# Altium PCB SensorBoard.PcbDoc
Units mm, origin at the board's own origin, x right, y up, seen from the top; angles counter-clockwise.
Board outline 50.6 x 61.95 mm, 2 copper layers (Top Layer, Bottom Layer); 26 components, 34 nets, 150 pads, 24 vias.
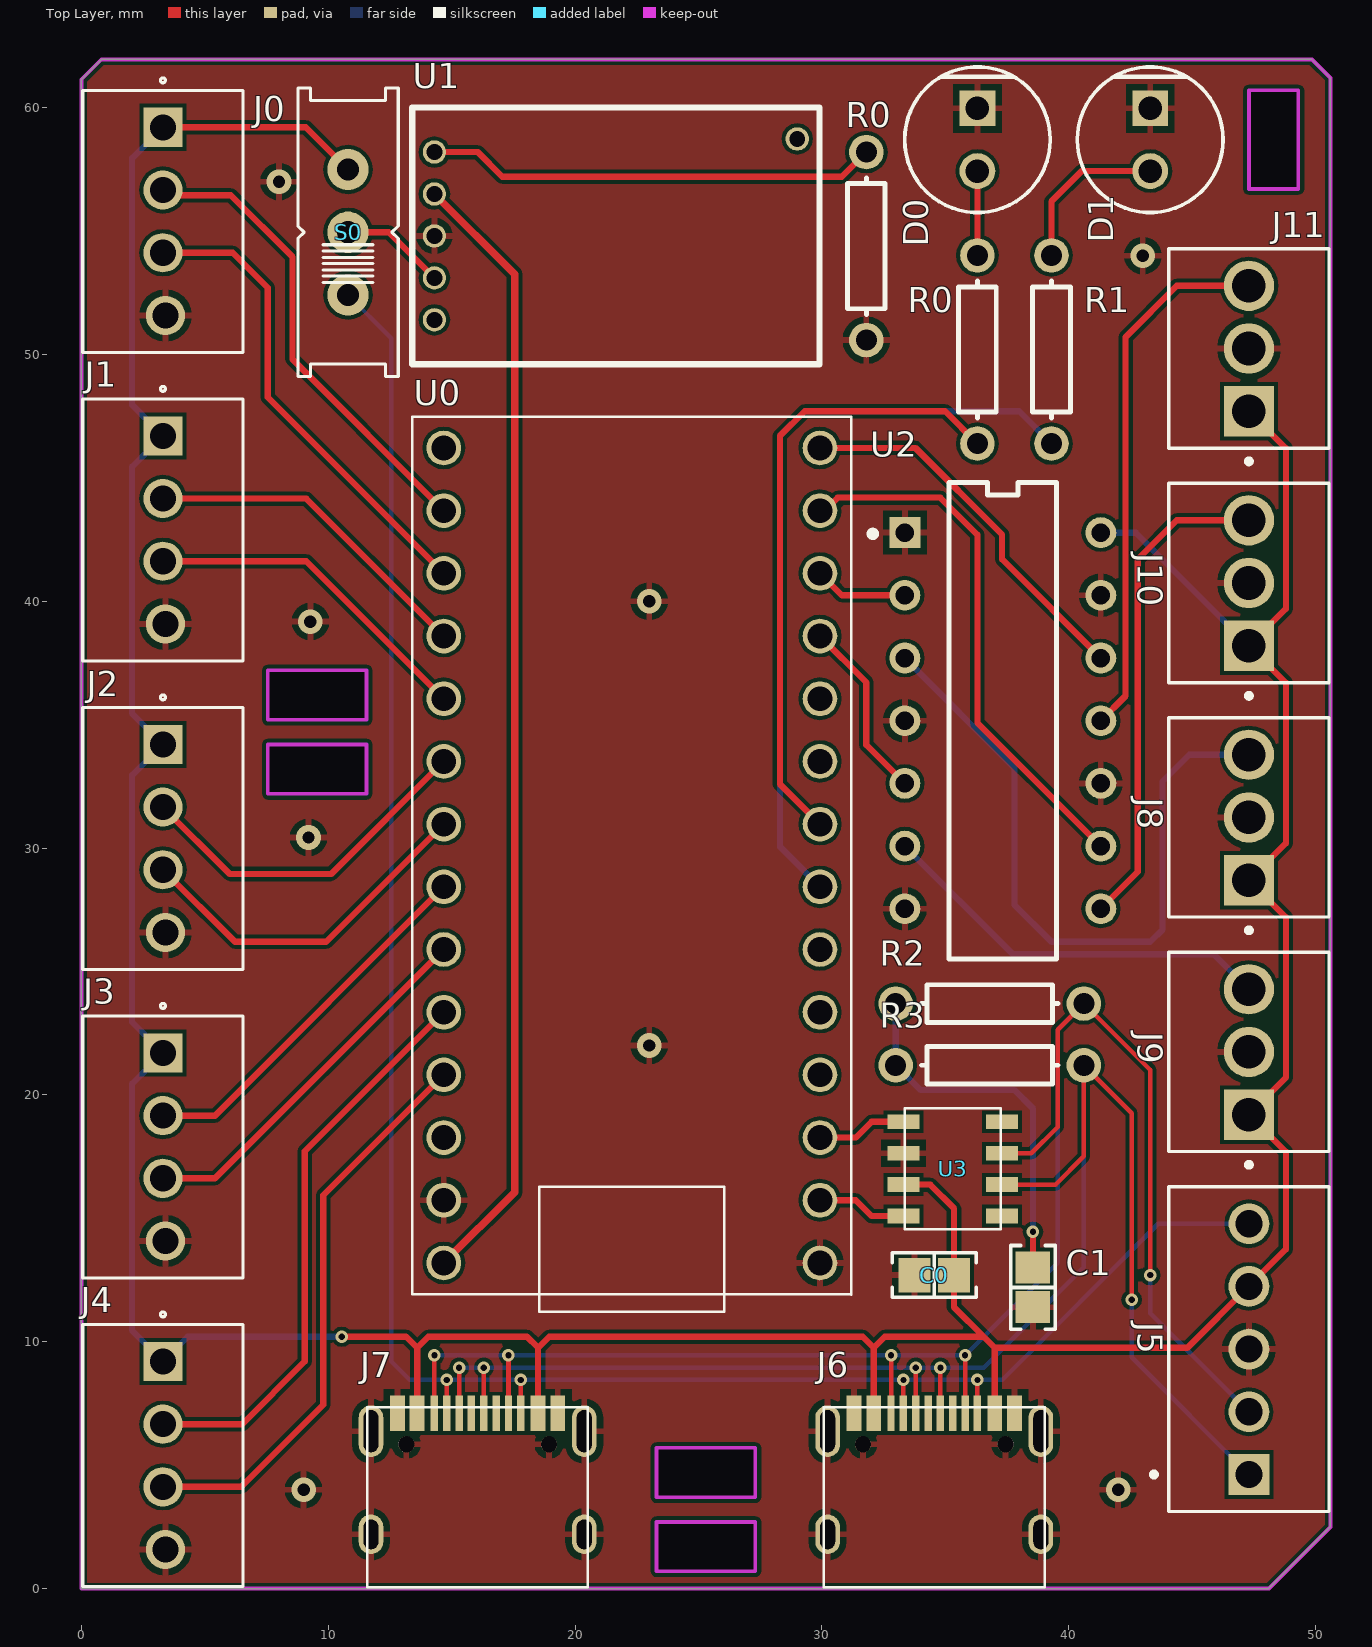
[diagram p0: Top Layer view]
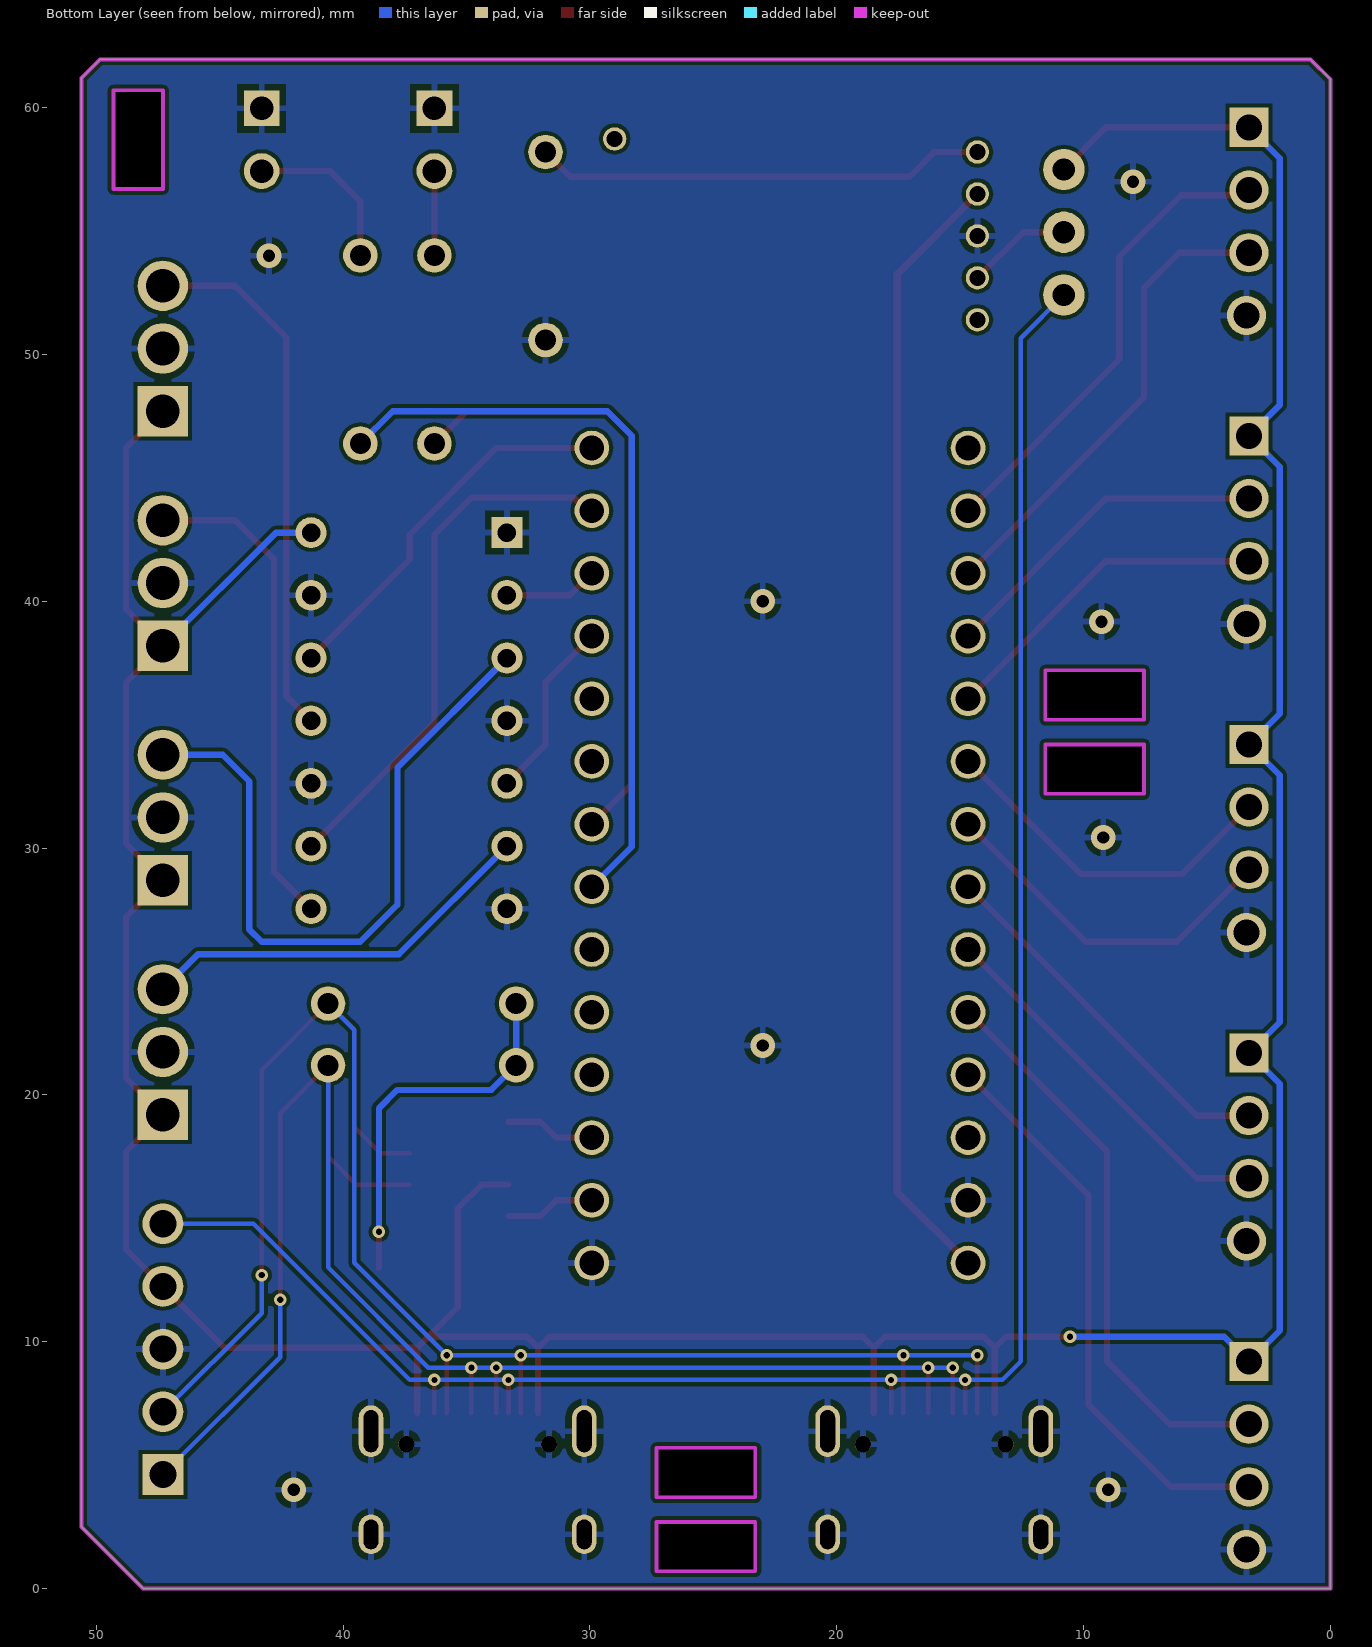
[diagram p1: Bottom Layer view, seen from below]

## Layer stack, top to bottom
Top Solder: solder mask 0.0102, Solder Resist, Dk 3.5
Top Layer: signal copper 0.0356
Dielectric 1: dielectric 0.32, FR-4, Dk 4.8
Bottom Layer: signal copper 0.0356
Bottom Solder: solder mask 0.0102, Solder Resist, Dk 3.5

## Board outline
0.8,61.95 0,61.15 0,0 48.1,0 50.6,2.5 50.6,61.2 49.85,61.95 49.8,61.95
cut-out: 47.3,56.7 47.3,60.7 49.3,60.7 49.3,56.7
cut-out: 23.3,0.7 23.3,2.7 27.3,2.7 27.3,0.7
cut-out: 23.3,3.7 23.3,5.7 27.3,5.7 27.3,3.7
cut-out: 7.55,32.2 7.55,34.2 11.55,34.2 11.55,32.2
cut-out: 7.55,35.2 7.55,37.2 11.55,37.2 11.55,35.2

## Design rules (kind name [scope] priority, off if disabled: settings)
Clearance Clearance_M0BGA_Fanout [WithinRoom('M0BGA_Fanout')] p1: gap=0.065 ignorepadtopadclearanceinfootprint=FALSE except(0: Arc-Hole Track-Hole SMDPad-Hole THPad-Hole Via-Hole Fill-Hole Poly-Hole Region-Hole Text-Hole)
Clearance [All] p2: gap=0.152 ignorepadtopadclearanceinfootprint=FALSE except(0: Arc-Hole Track-Hole SMDPad-Hole THPad-Hole Via-Hole Fill-Hole Poly-Hole Region-Hole Text-Hole)
ComponentClearance [All] p1: gap=0.203 collisioncheckmode=3 verticalgap=0.203 showdistances=FALSE
FanoutControl Fanout_BGA [IsBGA] p1: bgadir=Out bgaviamode=Centered fanoutstyle=BGA fanoutdirection=Alternating viagrid=0.025 // Fanout_BGA (Default Rule)
HoleSize [All] p1: absolutevalues=TRUE maxlimit=2.54 minlimit=0.254 maxpercent=80.000 minpercent=20.000
HoleToHoleClearance [All] p1: gap=0.152 allowstackedmicrovias=TRUE
MinimumAnnularRing [All] p1: minimumring=0.005
MinimumSolderMaskSliver MinimumSolderMaskSliver_M0BGA_Fanout [All] p1: minsoldermaskwidth=0.1
MinimumSolderMaskSliver [All] p2: minsoldermaskwidth=0.127
PlaneClearance [All] p1: clearance=0.254
PolygonConnect [All] p1: connectstyle=Relief reliefconductorwidth=0.254 reliefentries=4 polygonreliefangle="90 Angle" airgapwidth=0.254
RoutingVias RoutingVias_M0BGA_Fanout [WithinRoom('M0BGA_Fanout')] p1: holewidth=0.1 width=0.2 viastyle="Through Hole" minholewidth=0.1 minwidth=0.2 maxholewidth=0.1 maxwidth=0.2
RoutingVias [All] p2: holewidth=0.254 width=0.358 viastyle="Through Hole" minholewidth=0.076 minwidth=0.178 maxholewidth=0.254 maxwidth=0.4
SilkToSilkClearance [All] p1: silktosilkclearance=0.127
SilkToSolderMaskClearance [IsPad] p1: minsilkscreentomaskgap=0.127 clearancetoexposedcopper=TRUE
SolderMaskExpansion SolderMaskExpansion_M0BGA_Fanout [WithinRoom('M0BGA_Fanout')] p1: expansion=0.01 istentingtop=FALSE
SolderMaskExpansion [All] p2: expansion=0.102 istentingtop=FALSE
UnRoutedNet [All] p1: checkbadconnections=TRUE
Width Width_M0BGA_Fanout [WithinRoom('M0BGA_Fanout')] p1: maxlimit=0.065 minlimit=0.065 preferedwidth=0.065 minimp=50.000000 maximp=50.000000 favimp=50.000000
Width [All] p2: maxlimit=12.7 minlimit=0.065 preferedwidth=0.254 minimp=50.000000 maximp=50.000000 favimp=50.000000
21 further rules are at their usual default settings.

## Classes and differential pairs
component class DC-DCConverter: R0 S0 U1
component class CanTransceiver: C0 C1 R2 R3 U3
component class SensorBoard: D0 D1 J0 J1 J2 J3 J4 J5 J6 J7 J8 J9 J10 J11 R0 R1 U0 U2

## Components (designator, comment, footprint, x,y, rotation, side; value= is the part's Value field where it differs from the comment)
C0 "0.47µF" "CAP 0805_2012" 34.55,12.7 r0 top
C1 "0.47µF" "CAP 0805_2012" 38.55,12.2 r90 top
D0 "Diode_Lumex_SSL-LX5093GD_eec" Lumex_SSL-LX5093GD_0 36.3,58.7 r270 top
D1 "Diode_Lumex_SSL-LX5093GD_eec" Lumex_SSL-LX5093GD_0 43.3,58.7 r270 top
J0 "282834-4" *HDRV4W85P254_4X1_1062X650X1000 3.3,59.2 r270 top
J1 "282834-4" *HDRV4W85P254_4X1_1062X650X1000 3.3,46.7 r270 top
J2 "282834-4" *HDRV4W85P254_4X1_1062X650X1000 3.3,34.2 r270 top
J3 "282834-4" *HDRV4W85P254_4X1_1062X650X1000 3.3,21.7 r270 top
J4 "282834-4" *HDRV4W85P254_4X1_1062X650X1000 3.3,9.2 r270 top
J5 "282834-5" *TE_282834-5 47.3,9.7 r90 top
J6 "USB-C Socket" TYPE-C-31-M-12 34.55,3.7 r0 top
J7 "USB-C Socket" TYPE-C-31-M-12 16.05,3.7 r0 top
J8 "282834-3" *TE_282834-3 47.3,28.7 r90 top
J9 "282834-3" *TE_282834-3 47.3,19.2 r90 top
J10 "282834-3" *TE_282834-3 47.3,38.2 r90 top
J11 "282834-3" *TE_282834-3 47.3,47.7 r90 top
R0 "" AXIAL-0.3 31.8,54.39 r90 top value=1K
R0 "Res1" AXIAL-0.3 36.3,50.2 r90 top value=1K
R1 "Res1" AXIAL-0.3 39.3,50.2 r90 top value=1K
R2 "Res1" AXIAL-0.3 36.8,23.7 r0 top value=1K
R3 "Res1" AXIAL-0.3 36.8,21.2 r180 top value=1K
S0 "EG1218" *EG1218_EG1218(Primary) 10.8,54.95 r90 top
U0 "Teensy 3.2/4.0 Mounting" "Teensy 3.2-4.0" 22.3,29.7 r90 top
U1 "" NE12S0A0V10PNFA 29.9,60 r270 top
U2 "IC_Texas_Instruments_SN74AHCT125N_eec" Texas_Instruments_SN74AHCT125N_0 37.33,35.16 r0 top
U3 "High speed CAN Transiver NC Variant" TJA1051T 35.3,17 r270 top

## Footprints (in the part's own frame and the unit in brackets; to place one, negate y for a bottom-side part, rotate by r counter-clockwise, add the part's x,y. Pads: shape width x height; smd on the part's side, far side on the other; paste and mask are expansions set on the pad)
*EG1218_EG1218(Primary) [mil]
  round 66 hole 35.43: O(-100,0) P(0,0) S(100,0)
  silkscreen extent -230,-80 230,80
*HDRV4W85P254_4X1_1062X650X1000 [mm]
  rect 1.59x1.59 hole 1.06: 1(0,0)
  round 1.59 hole 1.06: 2(2.54,0) 3(5.08,0) 4(7.62,0.1)
  silkscreen extent -2,-3.25 9.12,3.25
*TE_282834-3 [mm]
  rect 2.04x2.04 hole 1.36: 1(0,0)
  round 2.04 hole 1.36: 2(2.54,0) 3(5.08,0)
  silkscreen extent -2.13,-3.25 6.58,3.25
*TE_282834-5 [mm]
  rect 1.65x1.65 hole 1.1: 1(-5.08,0)
  round 1.65 hole 1.1: 2(-2.54,0) 3(0,0) 4(2.54,0) 5(5.08,0)
  silkscreen extent -6.58,-3.25 6.58,3.95
AXIAL-0.3 [mm] "Axial Device, Thru-Hole; 2 Leads; 0.3 in Pin Spacing"
  round 1.4 hole 0.85: 1(-3.81,0) 2(3.81,0)
  silkscreen extent -2.77,-0.76 2.77,0.76
"CAP 0805_2012" [mm] "Chip Capacitor, 2-Leads, Body 2.00x1.20mm, IPC Medium Density"
  rect 1.3x1.4 smd: 1(-0.8,0) 2(0.8,0)
  silkscreen extent -1.7,-0.9 1.7,0.9, body extent -1,-0.64 1,0.64, height 1.26
Lumex_SSL-LX5093GD_0 [mm]
  rect 1.45x1.45 hole 0.95 paste-1000 mask+0: 1(-1.27,0)
  round 1.45 hole 0.95 paste-1000 mask+0: 2(1.27,0)
  silkscreen extent -2.95,-2.95 2.95,2.95
NE12S0A0V10PNFA [mm]
  round 0.946 hole 0.64: 1(8.6,-15.6) 2(6.9,-15.6) 3(5.2,-15.6) 4(3.5,-15.6) 5(1.8,-15.6) 6(1.27,-0.9)
  silkscreen extent 0,-16.5 10.4,0
"Teensy 3.2-4.0" [mm]
  round 1.406 hole 1: 0(-13.97,-7.62) 1(-11.43,-7.62) 2(-8.89,-7.62) 3(-6.35,-7.62) 3.3V(-11.43,7.62) 4(-3.81,-7.62) 5(-1.27,-7.62) 6(1.27,-7.62) 7(3.81,-7.62) 8(6.35,-7.62) 9(8.89,-7.62) 10(11.43,-7.62) 11(13.97,-7.62) 12(16.51,-7.62) 13(16.51,7.62) 14(13.97,7.62) 15(11.43,7.62) 16(8.89,7.62) 17(6.35,7.62) 18(3.81,7.62) 19(1.27,7.62) 20(-1.27,7.62) 21(-3.81,7.62) 22(-6.35,7.62) 23(-8.89,7.62) GND(-16.51,-7.62) GND2(-13.97,7.62) Vin(-16.51,7.62)
  silkscreen extent -18.48,-8.89 17.78,8.89, body extent -19.2,-8.9 17.8,8.97, height 4.39
Texas_Instruments_SN74AHCT125N_0 [mm]
  rect 1.25x1.25 hole 0.75 paste-1000 mask+0: 1(-3.97,7.62)
  round 1.25 hole 0.75 paste-1000 mask+0: 2(-3.97,5.08) 3(-3.97,2.54) 4(-3.97,0) 5(-3.97,-2.54) 6(-3.97,-5.08) 7(-3.97,-7.62) 8(3.97,-7.62) 9(3.97,-5.08) 10(3.97,-2.54) 11(3.97,0) 12(3.97,2.54) 13(3.97,5.08) 14(3.97,7.62)
  silkscreen extent -5.39,-9.65 2.17,9.65
TJA1051T [mm]
  rect 0.6x1.3 smd: 0(-1.91,-2) 1(-0.635,-2) 2(0.635,-2) 3(1.91,-2) 4(1.91,2) 5(0.635,2) 6(-0.635,2) 7(-1.91,2)
  silkscreen extent -2.45,-1.95 2.45,1.95
TYPE-C-31-M-12 [mm]
  rect 0.6x1.45 smd paste+0 mask+0.075: 0(-3.25,3.4)
  rect 0.6x1.45 smd mask+0.075: 1(-2.45,3.4) 10(2.45,3.4) 11(3.25,3.4)
  rect 0.3x1.45 smd mask+0.075: 2(-1.75,3.4) 3(-1.25,3.4) 4(-0.75,3.4) 5(-0.25,3.4) 6(0.25,3.4) 7(0.75,3.4) 8(1.25,3.4) 9(1.75,3.4)
  oval 1x1.6 hole 1.2 slot 0.6 at 0 deg mask+0.075: 12(-4.32,-1.506) 12(4.32,-1.506)
  oval 1x2.1 hole 1.7 slot 0.6 at 0 deg mask+0.075: 12(-4.32,2.675) 12(4.32,2.675)
  round 0.65 hole 0.65 mask+0: 12(-2.89,2.145) 12(2.89,2.145)
  silkscreen extent -4.47,-3.65 4.47,3.65

## Part data
C0 C1: library part C0805X474K4RACAUTO, "CAP CER 0.47UF 16V X7R 0805 AUTO", Device Package="0805 (2012 Metric)", Manufacturer=KEMET, Operating Temperature="-55°C ~ 125°C", Ratings=AEC-Q200, Supplier Part Number 1=399-16453-1-ND, Temperature Coefficient=X7R, Tolerance=±10%, Voltage - Rated=16V, Applications="Automotive, Boardflex Sensitive", Capacitance=0.47µF, ComponentLink1Description=Datasheet, ComponentLink1URL=https://api.kemet.com/component-edge/download/datasheet/C0805X474K4RACAUTO.pdf, ComponentLink2Description="DigiKey Link", ComponentLink2URL=http://digikey.com/product-detail/en/kemet/C0805X474K4RACAUTO/399-16453-1-ND/7803645, Features="Soft Termination", LastUpdated="1/21/2020 12:03:05 AM", Lifecycle Status=Active, Minimum Order=1, Mounting Type="Surface Mount, MLCC", Package / Case="0805 (2012 Metric)", Packaging=TapeAndReel, Part Number=C0805X474K4RACAUTO, Part Status=Active, PartId=2963, Price=0.25, Series="SMD Auto X7R Flex", Size / Dimension="0.079\" L x 0.049\" W (2.00mm x 1.25mm)", Supplier 1=DigiKey, Thickness (Max)="0.039\" (1.00mm)"
D0 D1: "DIODE LED GRN DIFF 5MM ROUND T/H", Current=20mA, Digikey Part Number=67-1098-ND, Manufacturer=Lumex, Mouser Part Number=696-SSL-LX5093GD, Package=RADIAL, Part Number=SSL-LX5093GD, Temperature="-40°C to +85°C", Temperature Range High=+85°C, Temperature Range Low=-40°C, Voltage - Forward (Vf) (Typ)=2.2V, ComponentLink1Description=Upverter, ComponentLink1URL=https://upverter.com/upn/revision/3e2d87dde4bc0270/, ComponentLink2Description=Datasheet, ComponentLink2URL=https://upverter.com/datasheet/272633366bbf9b7ac85ecec6850b6be956700e69.pdf, Digikey Description="DIODE LED GRN DIFF 5MM ROUND T/H", helpURL=https://upverter.com/upn/revision/3e2d87dde4bc0270/, Lead Free=yes, Price=0.134141512812, RoHS=TRUE, Supplier 1=Digi-Key, Supplier 2=Mouser, Supplier Part Number 1=67-1098-ND, Supplier Part Number 2=696-SSL-LX5093GD, Viewing Angle=60°
J0 J1 J2 J3 J4: "4 Position Wire to Board Terminal Block Horizontal with Board 0.100 _2.54mm_ Through Hole", Package=None, Availability=Unavailable, Centerline_Pitch="2.54 mm[.1 in]", EU_RoHS_Compliance="Compliant with Exemptions", MF="TE Connectivity", MP=282834-4, Number_of_Positions=4, Price=None, SnapEDA_Link=https://www.snapeda.com/parts/282834-4/TE%20Connectivity%20AMP%20Connectors/view-part/448422/?ref=snap, TE_purchase_URL=https://www.te.com/usa-en/product-282834-4.html?te_bu=Cor&te_type=disp&te_campaign=seda_glo_cor-seda-global-disp-prtnr-fy19-seda-model-bom-cta_sma-317_1&elqCampaignId=32493
J5: "Buchanan; Conn; Term Blk; PCB; 5; 2.54mm; Front; 30-16 AWG; Green; 10 A; 150 V", Package=None, Availability=Unavailable, EU_RoHS_Compliance="Compliant with Exemptions", MF="TE Connectivity", MP=282834-5, Price=None, SnapEDA_Link=https://www.snapeda.com/parts/282834-5/TE%20Connectivity%20AMP%20Connectors/view-part/641357/?ref=snap, TE_purchase_URL=https://www.te.com/usa-en/product-282834-5.html?te_bu=Cor&te_type=disp&te_campaign=seda_glo_cor-seda-global-disp-prtnr-fy19-seda-model-bom-cta_sma-317_1&elqCampaignId=32493
J6 J7: library part TYPE-C-31-M-12
J8 J9 J10 J11: "3 Position Wire to Board Terminal Block Horizontal with Board 0.100 _2.54mm_", Package=None, Availability=Unavailable, EU_RoHS_Compliance="Compliant with Exemptions", MF="TE Connectivity", MP=282834-3, Price=None, SnapEDA_Link=https://www.snapeda.com/parts/282834-3/TE%20Connectivity%20AMP%20Connectors/view-part/398089/?ref=snap, TE_purchase_URL=https://www.te.com/usa-en/product-282834-3.html?te_bu=Cor&te_type=disp&te_campaign=seda_glo_cor-seda-global-disp-prtnr-fy19-seda-model-bom-cta_sma-317_1&elqCampaignId=32493
R0: library part Res1, "Resistor", LatestRevisionDate=17-Jul-2002, LatestRevisionNote="Re-released for DXP Platform.", PackageDescription="Axial Device, Thru-Hole; 2 Leads; 0.3 in Pin Spacing", PackageReference=AXIAL-0.3, Published=8-Jun-2000, Publisher="Altium Limited"
R0 R1 R2 R3: "Resistor", LatestRevisionDate=17-Jul-2002, LatestRevisionNote="Re-released for DXP Platform.", PackageDescription="Axial Device, Thru-Hole; 2 Leads; 0.3 in Pin Spacing", PackageReference=AXIAL-0.3, Published=8-Jun-2000, Publisher="Altium Limited"
S0: "Slide Switch SPDT Through Hole", Package="FakePackage u", Availability=Unavailable, MF=E-Switch, MP=EG1218, Price=None, SnapEDA_Link=https://www.snapeda.com/parts/EG1218/E-Switch/view-part/13895/?ref=snap
U0: library part "Teensy 3.2/4.0"
U1: library part Component_1
U2: "IC BUS BUFFER TRI-ST QD 14DIP", Digikey Part Number=296-4655-5-ND, Manufacturer="Texas Instruments", Mouser Part Number=595-SN74AHCT125N, Package=PDIP-14, Part Number=SN74AHCT125N, Temperature="-40°C to +125°C", Temperature Range High=+125°C, Temperature Range Low=-40°C, ComponentLink1Description=Upverter, ComponentLink1URL=https://upverter.com/upn/revision/1c4f862725617c4f/, ComponentLink2Description=Datasheet, ComponentLink2URL=http://www.ti.com/lit/ds/symlink/sn74ahct125.pdf, Digikey Description="IC BUS BUFFER TRI-ST QD 14DIP", helpURL=https://upverter.com/upn/revision/1c4f862725617c4f/, Ipc Land Pattern Name=DIP794W46P254L1930H508Q14, Lead Free=yes, Price=0.244397165503, RoHS=TRUE, Supplier 1=Digi-Key, Supplier 2=Mouser, Supplier Part Number 1=296-4655-5-ND, Supplier Part Number 2=595-SN74AHCT125N
U3: library part TJA1051T

## Via types
v1: diameter 0.508, hole 0.254, Top Layer to Bottom Layer, 16 vias
v2: diameter 1, hole 0.5, Top Layer to Bottom Layer, 8 vias

## Nets (pads, with @x,y where several pads share a name; then routed paths per layer and width w, separated by ;. In a path a pad name is that pad's centre, name@x,y a point inside that pad or via, vN(x,y) a via of type N, cw(c..) or ccw(c..) an arc to the next point about the centre after c; other vN are vias at no path point)
+5: C0.2 J0.1 J1.1 J2.1 J3.1 J4.1 J5.4 J6.1 J6.10 J7.1 J7.10 J8.1 J9.1 J10.1 J11.1 S0.S U2.14 U3.2 | length 176.2
  Top Layer w0.254: J0.1 9.09,59.2 S0.S ; v1(10.55,10.2) 13.15,10.2 13.6,9.75 ; J7.1 13.6,9.75 ; J7.10 18.5,9.75 ; J6.1 32.1,9.75 ; U3.2 34.385,16.365 35.35,15.4 C0.2 35.35,11.4 36.55,10.2 ; J6.10 37,9.75 ; J11.1 48.8,46.2 48.8,39.7 J10.1 48.8,36.7 48.8,30.2 J8.1 48.8,27.2 48.8,20.7 J9.1 48.8,17.7 48.8,13.74 J5.4 44.81,9.75 37,9.75 ; 13.6,9.75 14.05,10.2 18.05,10.2 18.5,9.75 ; 18.5,9.75 18.95,10.2 31.65,10.2 32.1,9.75 ; 32.1,9.75 32.55,10.2 36.55,10.2 ; 36.55,10.2 37,9.75
  Bottom Layer w0.254: J0.1 2.05,57.95 2.05,47.95 J1.1 2.05,45.45 2.05,35.45 J2.1 2.05,32.95 2.05,22.95 J3.1 2.05,20.45 2.05,10.45 J4.1 4.3,10.2 v1(10.55,10.2) ; U2.14 42.72,42.78 J10.1
+12: J5.5 J6.3 J6.9 J7.3 J7.9 S0.O | length 87
  Top Layer w0.185: J7.3 v1(14.8,8.45) ; J7.9 v1(17.8,8.45) ; J6.3 v1(33.3,8.45) ; J6.9 v1(36.3,8.45)
  Bottom Layer w0.185: S0.O 12.55,50.66 12.55,9.2 13.3,8.45 v1(14.8,8.45) v1(17.8,8.45) v1(33.3,8.45) v1(36.3,8.45) 37.3,8.45 43.63,14.78 J5.5
A0: J0.2 U0.14 | length 19.2
  Top Layer w0.254: J0.2 3.51,56.45 6.05,56.45 8.55,53.95 8.55,49.8 U0.14
A1: J1.2 U0.16 | length 13.7
  Top Layer w0.254: J1.2 9.11,44.16 U0.16
A2: J2.2 U0.18 | length 14.4
  Top Layer w0.254: J2.2 6.01,28.95 10.12,28.95 U0.18
A3: J3.2 U0.20 | length 15.2
  Top Layer w0.254: J3.2 5.41,19.16 U0.20
A4: J4.2 U0.22 | length 23.3
  Top Layer w0.254: J4.2 6.51,6.66 9.05,9.2 9.05,17.72 U0.22
B0: J0.3 U0.15 | length 19.4
  Top Layer w0.254: J0.3 6.13,54.12 7.55,52.7 7.55,48.26 U0.15
B1: J1.3 U0.17 | length 13.7
  Top Layer w0.254: J1.3 9.11,41.62 U0.17
B2: J2.3 U0.19 | length 14.6
  Top Layer w0.254: J2.3 6.22,26.2 9.91,26.2 U0.19
B3: J3.3 U0.21 | length 15.2
  Top Layer w0.254: J3.3 5.41,16.62 U0.21
B4: J4.3 U0.23 | length 23.3
  Top Layer w0.254: J4.3 6.47,4.12 9.8,7.45 9.8,15.93 U0.23
CANH: J5.2 J6.2 J6.8 J7.2 J7.8 R2.2 U3.6 | length 74.6
  Top Layer w0.185: J7.2 v1(14.3,9.45) ; J7.8 v1(17.3,9.45) ; J6.2 v1(32.8,9.45) ; J6.8 v1(35.8,9.45) ; U3.6 38.485,17.635 39.55,18.7 39.55,22.64 R2.2 43.3,21.01 v1(43.3,12.7)
  Bottom Layer w0.185: v1(14.3,9.45) v1(17.3,9.45) v1(32.8,9.45) v1(35.8,9.45) 39.55,13.2 39.55,22.64 R2.2 ; v1(43.3,12.7) 43.3,11.16 J5.2
CANL: J5.1 J6.4 J6.6 J7.4 J7.6 R3.1 U3.5 | length 69.4
  Top Layer w0.185: J7.4 v1(15.3,8.95) ; J7.6 v1(16.3,8.95) ; J6.4 v1(33.8,8.95) ; J6.6 v1(34.8,8.95) ; U3.5 39.465,16.365 40.61,17.51 R3.1 42.55,19.26 v1(42.55,11.7)
  Bottom Layer w0.185: v1(15.3,8.95) v1(16.3,8.95) v1(33.8,8.95) v1(34.8,8.95) 36.55,8.95 40.61,13.01 R3.1 ; v1(42.55,11.7) 42.55,9.37 J5.1
GND: C0.1 C1.1 D0.1 D1.1 J0.4 J1.4 J2.4 J3.4 J4.4 J5.3 J6.0 J6.11 J6.12 J7.0 J7.11 J7.12 J8.2 J9.2 J10.2 J11.2 R0.1@31.8,50.58 U0.GND U0.GND2 U1.3 U2.1 U2.4 U2.7 U2.10 U2.13 U3.1
  other v2: 9,4 42,4 23,22 9.2,30.425 9.275,39.175 23,40 43,54 8,57
INLED1: U0.10 U2.2 | length 3.8
  Top Layer w0.254: U0.10 30.81,40.24 U2.2
INLED2: U0.9 U2.5 | length 7.4
  Top Layer w0.254: U0.9 31.8,36.71 31.8,34.18 U2.5
INLED3: U0.11 U2.9 | length 21.9
  Top Layer w0.254: U0.11 30.115,43.67 30.645,44.2 34.8,44.2 36.3,42.7 36.3,35.08 U2.9
INLED4: U0.12 U2.12 | length 15.5
  Top Layer w0.254: U0.12 33.79,46.21 37.3,42.7 37.3,41.7 U2.12
NetC1_2: C1.2 R2.1 R3.2 | length 15.2
  Top Layer w0.254: C1.2 38.55,13.5 v1(38.55,14.45)
  Bottom Layer w0.254: R2.1 R3.2 33.99,20.2 37.8,20.2 38.55,19.45 v1(38.55,14.45)
NetD0_2: D0.2 R0.2@36.3,54.01 | length 3.4
  Top Layer w0.254: R0.2@36.3,54.01 D0.2
NetD1_2: D1.2 R1.2 | length 6.7
  Top Layer w0.254: R1.2 39.3,56.2 40.53,57.43 D1.2
NetR0_1: R0.1@36.3,46.39 U0.6 | length 25.4
  Top Layer w0.254: U0.6 28.3,32.59 28.3,46.7 29.3,47.7 34.99,47.7 R0.1@36.3,46.39
NetR0_2: R0.2@31.8,58.2 U1.5 | length 18.3
  Top Layer w0.254: U1.5 16.05,58.2 17.05,57.2 30.8,57.2 R0.2@31.8,58.2
NetR1_1: R1.1 U0.5 | length 30.9
  Bottom Layer w0.254: U0.5 28.3,30.05 28.3,46.7 29.3,47.7 37.99,47.7 R1.1
NetS0_P: S0.P U1.2 | length 4.3
  Top Layer w0.254: S0.P 12.45,54.95 U1.2
OUTLED1: J8.3 U2.3 | length 28.6
  Bottom Layer w0.254: U2.3 37.8,33.26 37.8,27.7 39.3,26.2 43.3,26.2 43.8,26.7 43.8,32.7 44.88,33.78 J8.3
OUTLED2: J9.3 U2.6 | length 16.3
  Bottom Layer w0.254: U2.6 37.74,25.7 45.88,25.7 J9.3
OUTLED3: J10.3 U2.8 | length 19.9
  Top Layer w0.254: U2.8 42.8,29.04 42.8,41.7 44.38,43.28 J10.3
OUTLED4: J11.3 U2.11 | length 21.8
  Top Layer w0.254: U2.11 42.3,36.16 42.3,50.7 44.38,52.78 J11.3
RXD: U0.0 U3.3 | length 3.6
  Top Layer w0.254: U0.0 31.37,15.73 32.01,15.09 U3.3
S: U3.7
TXD: U0.1 U3.0 | length 3.6
  Top Layer w0.254: U0.1 31.37,18.27 32.01,18.91 U3.0
Vin: U0.Vin U1.4 | length 45.8
  Top Layer w0.305: U1.4 17.55,53.25 17.55,16.06 U0.Vin
pads on no net: J6.5 J6.7 J7.5 J7.7 U0.2 U0.3 U0.3.3V U0.4 U0.7 U0.8 U0.13 U1.1 U1.6 U3.4

## Polygon pours and split planes (outlines as drawn)
GND on Bottom Layer "BotGND" (solid, pour order 3): 0,61.15 0.8,61.95 49.85,61.95 50.6,61.2 50.6,2.49 48.11,0 0,0
no net on Bottom Layer "BotGND" (solid, pour order 1): 0,61.15
no net on Bottom Layer "BotGND" (solid, pour order 0): 0.2,61.2
GND on Top Layer "BotGND" (solid, pour order 2): 0,61.15 0.8,61.95 49.85,61.95 50.6,61.2 50.6,2.49 48.11,0 0,0

## Keep-outs
Keep-Out Layer:
  lines w0.152: 0,0 0,61.15 0.8,61.95 49.85,61.95 50.6,61.2 50.6,2.49 48.11,0 0,0 ; 7.55,32.2 7.55,34.2 11.55,34.2 11.55,32.2 7.55,32.2 ; 7.55,35.2 11.55,35.2 11.55,37.2 7.55,37.2 7.55,35.2 ; 23.3,0.7 27.3,0.7 27.3,2.7 23.3,2.7 23.3,0.7 ; 23.3,3.7 23.3,5.7 27.3,5.7 27.3,3.7 23.3,3.7 ; 47.3,56.7 47.3,60.7 49.3,60.7 49.3,56.7 47.3,56.7